# Altium PCB LedArray.PcbDoc
Units mm, origin at the board's own origin, x right, y up, seen from the top; angles counter-clockwise.
Board outline 67.5 x 20 mm, 2 copper layers (Top Layer, Bottom Layer); 41 components, 88 nets, 267 pads, 146 vias.
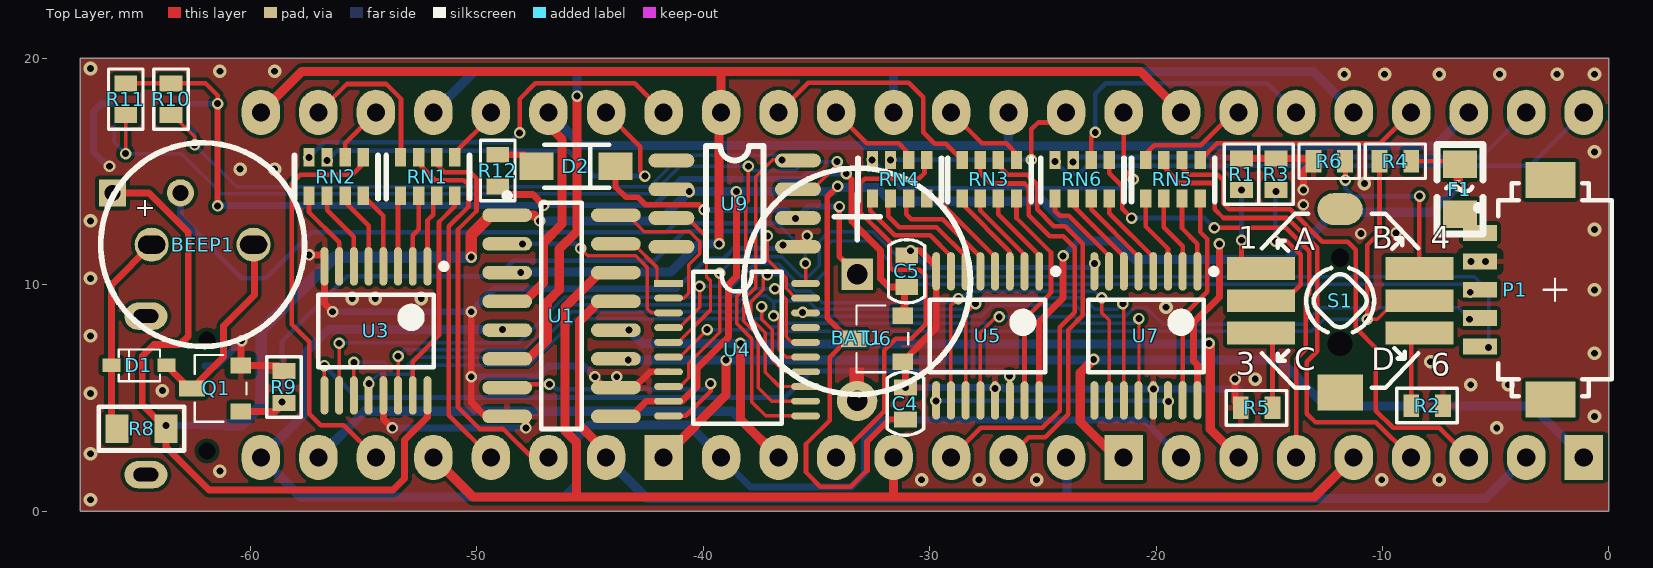
[diagram p0: Top Layer view]
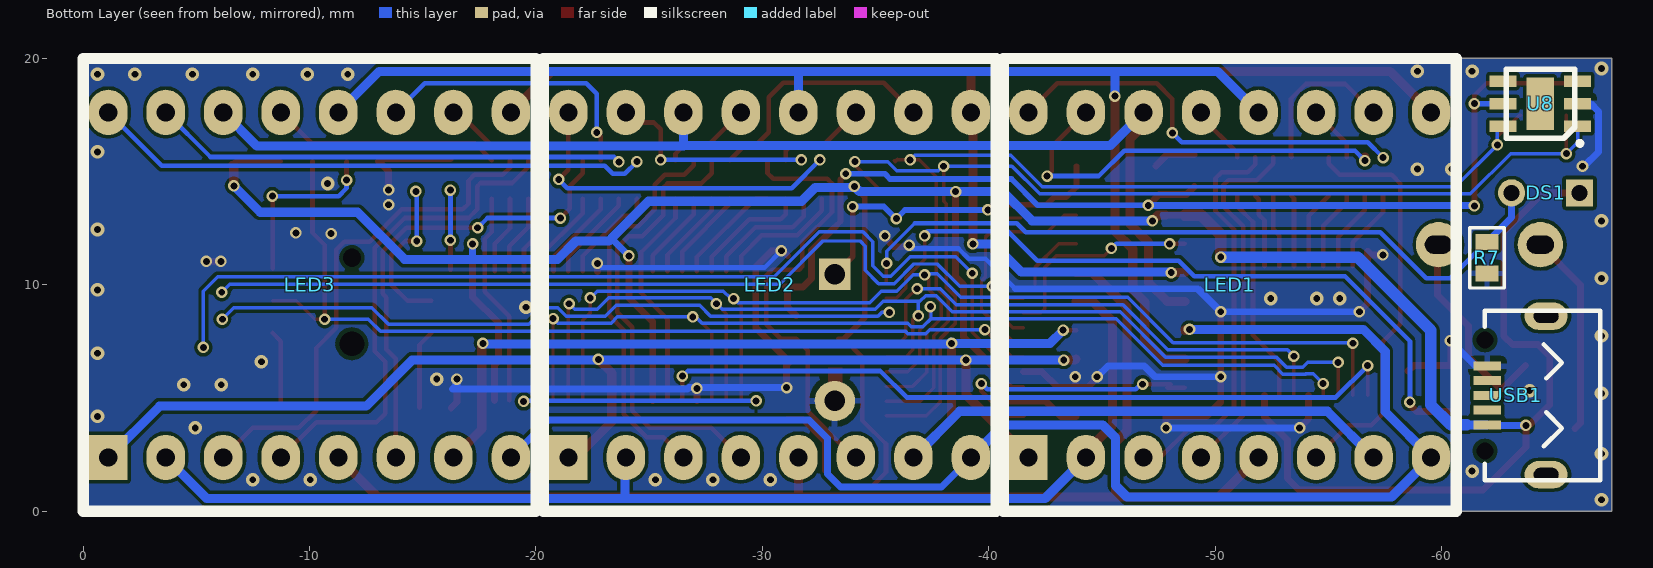
[diagram p1: Bottom Layer view, seen from below]
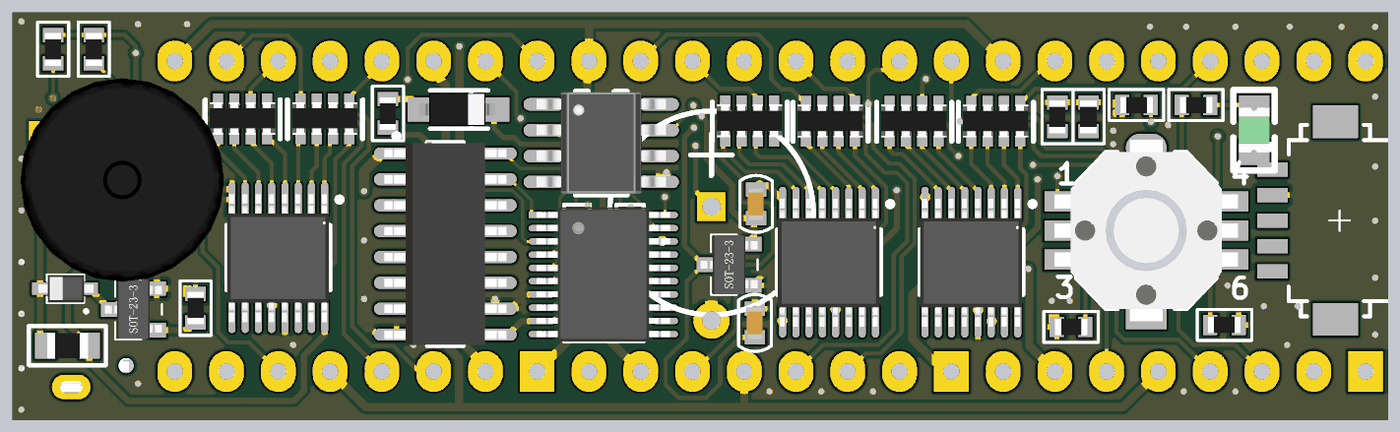
[diagram p2: 3D render of the assembled board from above, using the file's embedded part models]

## Layer stack, top to bottom
Top Solder: solder mask 0.0102, Solder Resist, Dk 3.5
Top Layer: signal copper 0.0356
Dielectric 1: dielectric 0.32, FR-4, Dk 4.8
Bottom Layer: signal copper 0.0356
Bottom Solder: solder mask 0.0102, Solder Resist, Dk 3.5

## Board outline
-67.5,0 -67.5,20 0,20 0,0

## Design rules (kind name [scope] priority, off if disabled: settings)
Clearance [All] p1: gap=0.152 ignorepadtopadclearanceinfootprint=FALSE
ComponentClearance ComponentClearance_1 [InComponent('BEEP1','LED1','LED2','LED3','BAT1','P1')] p1: gap=0 collisioncheckmode=3 verticalgap=0 showdistances=FALSE
ComponentClearance [All] p2: gap=0.254 collisioncheckmode=3 verticalgap=0.254 showdistances=FALSE
PolygonConnect PolygonConnect_1 [IsVia] p1: connectstyle=Direct reliefconductorwidth=0.254 reliefentries=4 polygonreliefangle="90 Angle" airgapwidth=0.254
PolygonConnect [All] p2: connectstyle=Relief reliefconductorwidth=0.254 reliefentries=4 polygonreliefangle="90 Angle" airgapwidth=0.254
RoutingVias [All] p1: holewidth=0.305 width=0.508 viastyle="Through Hole" minholewidth=0.305 minwidth=0.508 maxholewidth=0.711 maxwidth=1.27
SolderMaskExpansion [All] p1: expansion=0.102
Width [All] p1: maxlimit=0.508 minlimit=0.152 preferedwidth=0.203
29 further rules are at their usual default settings.

## Components (designator, comment, footprint, x,y, rotation, side; value= is the part's Value field where it differs from the comment)
BAT1 "BATT" BATTERY1 -33.198,16.561 r270 top locked
BEEP1 "BEEP" "蜂鸣器 9*5mm" -62.106,11.778 r0 top locked
C4 "0.1uF" 0603C -31.064,4.061 r90 top
C5 "0.1uF" 0603C -31.013,9.906 r90 top
D1 "S4" SOD-323F -63.709,6.444 r180 top
D2 "" SOD-123 -45.669,15.24 r0 top
DS1 "RES_PHOTO" LDR -64.586,14.064 r180 bottom
F1 "FUSE" 0805FZ -6.477,14.224 r270 top
LED1 "LED8*8 CPM7088BR" "LED8*8 CPM7088BR" -50.64,10 r180 bottom locked
LED2 "LED8*8 CPM7088BR" "LED8*8 CPM7088BR" -30.32,10 r180 bottom locked
LED3 "LED8*8 CPM7088BR" "LED8*8 CPM7088BR" -10,10 r180 bottom locked
P1 "CON5" SMT_1.25W-5P -5.682,12.286 r90 top
Q1 "S8050" SOT-23 -60.419,4.412 r90 top
R1 "10R" 0603R -16.223,15.588 r270 top
R2 "20K" 0603R -7.33,4.666 r180 top
R3 "2K" 0603R -14.699,15.588 r270 top
R4 "4.7K" 0603R -10.13,15.461 r0 top
R5 "4.7K" 0603R -16.256,4.572 r0 top
R6 "10K" 0603R -13.048,15.461 r0 top
R7 "4.7K" 0603R -62,10.5 r90 bottom
R8 "10R" 0805R -65.88,3.65 r0 top
R9 "10K" 0603R -58.514,4.79 r90 top
R10 "10K" 0603R -63.5,18.9 r270 top
R11 "10K" 0603R -65.5,18.9 r270 top
R12 "10K" 0603R -49.073,15.748 r270 top
RN1 "1K" 0603*4 -53.34,13.988 r0 top
RN2 "1K" 0603*4 -57.384,13.988 r0 top
RN3 "1K" 0603*4 -28.537,13.861 r0 top
RN4 "1K" 0603*4 -32.499,13.87 r0 top
RN5 "1K" 0603*4 -20.427,13.861 r0 top
RN6 "1K" 0603*4 -24.435,13.861 r0 top
S1 "SW-5WAY" SW_5WAY -11.867,9.299 r0 top locked
U1 "ICN2012" SOIC-16N -46.355,8.636 r270 top locked
U3 "74HC595" TSSOP16 -54.45,7.968 r180 top
U4 "N76E003AT20" TSSOP20 -41.529,10.063 r270 top locked
U5 "74HC595" TSSOP16 -27.432,7.747 r180 top locked
U6 "SGM2021-3.3" SOT-23 -31.191,6.604 r90 top
U7 "74HC595" TSSOP16 -20.447,7.747 r180 top locked
U8 "Si7021" QFN-6 -64.35,18 r90 bottom locked
U9 "DS3231MZ" SOIC-8 -41.402,15.494 r0 top locked
USB1 "USB_Micro" USB_Micro-A -62.01,5.118 r90 bottom locked

## Footprints (in the part's own frame and the unit in brackets; to place one, negate y for a bottom-side part, rotate by r counter-clockwise, add the part's x,y. Pads: shape width x height; smd on the part's side, far side on the other; paste and mask are expansions set on the pad)
0603*4 [mm]
  rect 0.5x0.8 smd: 1(-0.025,-0.051) 2(0.775,-0.051) 3(1.575,-0.051) 4(2.375,-0.051) 5(2.375,1.649) 6(1.575,1.649) 7(0.775,1.649) 8(-0.025,1.649)
  silkscreen extent -0.66,-0.18 3.02,1.73, body extent -0.43,0.01 2.77,1.61, height 0.51
0603C [mm]
  rect 0.7x1 smd: 1(0,0) 2(1.4,0)
  silkscreen extent -0.7,-0.8 2.1,0.8, body extent -0.11,-0.38 1.49,0.42, height 0.8
0603R [mm]
  rect 0.7x1 smd: 1(0,0) 2(1.4,0)
  silkscreen extent -0.64,-0.76 2.03,0.76, body extent -0.09,-0.41 1.51,0.39, height 0.41
0805FZ [mm]
  rect 1.2x1.5 smd: 1(-1.105,-0.1) 2(1.105,-0.1)
  silkscreen extent -1.98,-1.12 1.98,0.92, body extent -1.1,-0.85 1.11,0.65, height 1.24
0805R [mil]
  rect 40x50 smd: 1(0,0) 2(85,0)
  silkscreen extent -32,-38 117,38, body extent 4,-25 82,24, height 20
BATTERY1 [mil] "5.6mm"
  rect 55x55 hole 35.43: 1(240,0)
  round 70 hole 35.43: 2(460,0)
  silkscreen extent 55,-197 449,197
LDR [mm]
  rect 1.2x1.2 hole 0.7 mask+0.051: 1(1.5,0)
  round 1.2 hole 0.7 mask+0.051: 2(-1.5,0)
  body extent -2.5,-2.25 2.5,2.25, height 7.81
"LED8*8 CPM7088BR" [mm]
  rect 1.7x2 hole 0.8: 1(-8.89,-7.62)
  oval 1.7x2 hole 0.8: 2(-6.35,-7.62) 3(-3.81,-7.62) 4(-1.27,-7.62) 5(1.27,-7.62) 6(3.81,-7.62) 7(6.35,-7.62) 8(8.89,-7.62) 9(8.89,7.62) 10(6.35,7.62) 11(3.81,7.62) 12(1.27,7.62) 13(-1.27,7.62) 14(-3.81,7.62) 15(-6.35,7.62) 16(-8.89,7.62)
  silkscreen extent -10,-10 10,10
QFN-6 [mm] "Pitch 1mm"
  rect 2.3x1.2 smd: 0(0,0)
  rect 0.5x1.2 smd: 1(-1,-1.65) 2(0,-1.65) 3(1,-1.65) 4(1,1.65) 5(0,1.65) 6(-1,1.65)
  silkscreen extent -1.85,-1.85 1.52,1.5, body extent -1.52,-1.52 1.52,1.5, height 1
SMT_1.25W-5P [mm] "Pitch 1.25mm, Single Row, 9 Contacts, Right Angle SMT Header, Series DF13"
  rect 0.7x1.5 smd: 1(0,0) 2(-1.25,0) 3(-2.5,0) 4(-3.75,0) 5(-5,0)
  rect 1.6x2.2 smd: MEC1(-7.35,-3.1) MEC2(2.35,-3.1)
  silkscreen extent -7.2,-5.8 2.2,0.2
SOD-123 [mm] "Molded Diode, 2-Leads, Body 3.90x1.60mm, IPC Medium Density"
  rect 1.5x1.2 smd: 1(-1.7,0) 2(1.8,0)
  silkscreen extent -1.35,-0.94 1.52,0.94, body extent -1.85,-0.8 1.85,0.8, height 1.27
SOD-323F [mm]
  rect 0.8x0.6 smd: 1(0,0) 2(2.425,0)
  silkscreen extent 0.28,-0.7 2.1,0.7, body extent -0.19,-0.68 2.51,0.68, height 0.79
SOIC-8 [mil]
  oval 80x24 smd: 1(0,0) 2(0,-50) 3(0,-100) 4(0,-150) 5(220,-150) 6(220,-100) 7(220,-50) 8(220,0)
  silkscreen extent 60,-175 160,25, body extent -15,-173 235,24, height 74
SOIC-16N [mm] "SOIC, 16-Leads, Body 9.90x3.90mm, Pitch 1.27mm, IPC Medium Density"
  oval 0.6x2.2 smd: 1(-4.445,-2.3) 2(-3.175,-2.3) 3(-1.905,-2.3) 4(-0.635,-2.3) 5(0.635,-2.3) 6(1.905,-2.3) 7(3.175,-2.3) 8(4.445,-2.3) 9(4.445,2.5) 10(3.175,2.5) 11(1.905,2.5) 12(0.635,2.5) 13(-0.635,2.5) 14(-1.905,2.5) 15(-3.175,2.5) 16(-4.445,2.5)
  silkscreen extent -5.42,-2.42 5,1, body extent -4.95,-2.9 4.95,3.1, height 1.4
SOT-23 [mil]
  rect 28x36 smd: 1(0,0) 2(80,0)
  rect 28x45 smd: 3(40,85)
  silkscreen extent -18,-10 98,80, body extent -17,-10 97,100, height 47
SW_5WAY [mm] "Navigation Switch - Multidirectional 5 Way (4-directional and center push)"
  rect 3x1 smd: 1(-3.5,1.425) 2(-3.5,0) 3(-3.5,-1.425) 4(3.5,1.425) 5(3.5,0) 6(3.5,-1.425)
  oval 2x1.4 smd: 7(0,4.05)
  rect 2x1.6 smd: 8(0,-4.05)
  round 1 hole 1.1 unplated: 9(0,-1.9)
  round 0.5 hole 0.8 unplated: 10(0,1.9)
  silkscreen extent -3.45,-3.85 3.45,3.85, body extent -4.5,-4.45 4.5,4.45, height 4.5
TSSOP16 [mm] "TSOP, 16-Leads, Body 5.00x4.40mm, Pitch 0.65mm, IPC Medium Density"
  oval 0.35x1.7 smd: 1(-2.275,-2.85) 2(-1.625,-2.85) 3(-0.975,-2.85) 4(-0.325,-2.85) 5(0.325,-2.85) 6(0.975,-2.85) 7(1.625,-2.85) 8(2.275,-2.85) 9(2.275,2.85) 10(1.625,2.85) 11(0.975,2.85) 12(0.325,2.85) 13(-0.325,2.85) 14(-0.975,2.85) 15(-1.625,2.85) 16(-2.275,2.85)
  silkscreen extent -3.13,-2.97 2.55,1.6, body extent -2.49,-3.11 2.51,3.17, height 1.09
TSSOP20 [mil]
  rect 12x50 smd: 1(0,0)
  oval 12x50 smd: 2(25.59,0) 3(51.18,0) 4(76.77,0) 5(102.36,0) 6(127.95,0) 7(153.54,0) 8(179.13,0) 9(204.72,0) 10(230.32,0) 11(230.32,238.34) 12(204.72,238.34) 13(179.13,238.34) 14(153.54,238.34) 15(127.95,238.34) 16(102.36,238.34) 17(76.77,238.34) 18(51.18,238.34) 19(25.59,238.34) 20(0,238.34)
  silkscreen extent -20,43 244,197, body extent -15,-10 245,248, height 47
USB_Micro-A [mm]
  oval 1.2x1.9 hole 0.6 slot 1.1 at 90 deg unplated: 0(-3.5,-2.6) 0(3.5,-2.6)
  round 0.7 hole 0.75 unplated: 0(-2.45,0.1) 0(2.45,0.1)
  rect 0.4x1.2 smd: 1(-1.3,0) 2(-0.65,0) 3(0,0) 4(0.65,0) 5(1.3,0)
  silkscreen extent -3.75,-5 3.75,0.1, body extent -4.1,-5.18 4.1,0.25, height 2.98
"蜂鸣器 9*5mm" [mm]
  round 1.5 / inner round 1.5 / far side round 2 hole 0.8 slot 1.2 at 0 deg: 1(-2.25,0) 2(2.25,0)
  silkscreen extent -4.5,-4.5 4.5,4.5, body extent -5,-5 5,5, height 5.6

## Part data
BAT1: library part PWR_BAT
BEEP1: "发声器件"
C4 C5: library part CAP, "CAP"
D1: library part DIODE, "Diode"
D2: library part "DIODE SCHOTTKY", "Schottky Diode"
Q1: library part NPN, "贴片 S8050/S9013/MMBT3904"
R1 R2 R3 R4 R5 R6 R7 R8 R9 R10 R11 R12: library part RES, "RESISTOR"
RN1 RN2 RN3 RN4 RN5 RN6: library part RES_PACK-4
U1: "LED 行驱动"
U3 U5 U7: "移位寄存器", ComponentAvailability="Not for New Design", ComponentLink1Description="Manufacturer Link", ComponentLink1URL=http://www.onsemi.com/, ComponentLink2Description=Datasheet, ComponentLink2URL=http://www.onsemi.com/pub/Collateral/MC74VHC595-D.PDF, DatasheetVersion=1997, LatestRevisionDate=13-Apr-2006, LatestRevisionNote="IPC-7351 Footprint Added.", PackageDescription="16-Pin Small Outline Package 1.27 mm Pitch", PackageReference=966-01, PackageVersion=1997, Published=15-Apr-2002, Publisher="Altium Limited"
U4: "Nuvoton MCU"
U6: library part SGM2021, "电源芯片 LDO", VO=0.9V,1.2V,1.3V,1.5V,~~~5.0V
U8: "温湿度传感器"
U9: "时钟芯片;内置晶振、32.768K时钟输出、1Hz方波输出"

## Via types
v1: diameter 0.508, hole 0.305, Top Layer to Bottom Layer, tented both sides, 107 vias
v2: diameter 0.6, hole 0.3, Top Layer to Bottom Layer, tented both sides, 39 vias

## Nets (pads, with @x,y where several pads share a name; then routed paths per layer and width w, separated by ;. In a path a pad name is that pad's centre, name@x,y a point inside that pad or via, vN(x,y) a via of type N, cw(c..) or ccw(c..) an arc to the next point about the centre after c; other vN are vias at no path point)
3.3V: C5.1 R10.1 R11.1 R12.2 U6.2 U8.5 | length 49.1
  Top Layer w0.203: R11.1 R10.1 -61.978,18.9 -61.443,18.364 v1(-61.443,18.009)
  Top Layer w0.254: v1(-61.443,13.487) v1(-61.443,18.009) ; v1(-33.68,14.91) -33.68,14.884 -33.452,14.656 -33.452,12.802 -33.198,12.548
  Top Layer w0.305: R12.2 -48.72,13.995 -47.523,13.995 v1(-47.041,13.513) ; -33.198,12.548 -32.174,11.524 -32.174,10.279 -31.801,9.906 C5.1@-31.115,9.906 ; U6.2@-31.496,8.636 -31.115,9.017 C5.1@-31.115,9.906 ; C5.1 C5.1@-31.115,9.906
  Bottom Layer w0.254: U8.5 -61.451,18 v1(-61.443,18.009) ; v1(-47.041,13.513) -42.164,13.513 -40.996,14.681 -35.636,14.681 -35.408,14.91 v1(-33.68,14.91)
  Bottom Layer w0.305: v1@-61.443,13.513 v1(-47.041,13.513)
595_RCLK: U3.12 U4.14 U5.12 U7.12 | length 49
  Top Layer w0.152: U3.12 -54.762,5.131 v1(-54.762,5.639) ; v1(-37.414,9.042) v1@-37.411,9.042 ; v1@-37.389,9.017 v1(-37.414,9.042) -37.414,9.039 -37.416,9.041 -37.42,9.037 -37.42,8.484 -36.948,8.012 -36.948,6.697 -36.414,6.163 U4.14 ; v1@-37.385,9.017 v1@-37.411,9.042 ; v1@-37.363,9.09 v1@-37.411,9.042 ; U5.12 -27.757,7.879 -27.051,8.585 v1(-26.924,8.585) ; U7.12 -20.803,4.928 -20.752,4.978 v1(-20.752,8.509)
  Bottom Layer w0.152: v1(-54.762,5.639) -54.331,6.071 -54,6.071 -53.992,6.063 -52.984,6.063 -52.595,6.452 -47.676,6.452 -45.618,8.509 -37.445,8.509 ; v1@-37.389,9.017 v1(-37.414,9.042) -37.445,9.011 -37.445,8.509 ; v1(-20.752,8.509) -20.955,8.306 -23.317,8.306 -23.597,8.585 v1(-26.924,8.585) -27.051,8.585 -27.33,8.306 -36.422,8.306 -36.576,8.152 -37.088,8.152 -37.445,8.509
595_SCLK: U3.11 U4.15 U5.11 U7.11 | length 50.1
  Top Layer w0.152: U3.11 -55.423,5.12 v1(-55.423,6.579) ; v1(-36.888,8.635) -36.888,8.654 v1@-36.855,8.687 ; v1@-36.881,8.712 v1@-36.855,8.687 ; U4.15 -36.328,6.813 -36.644,7.129 -36.644,8.475 v1@-36.855,8.687 ; U5.11 -28.407,8.728 v1(-27.965,9.169) ; v1(-21.463,9.169) -21.432,9.169 -21.422,9.16 U7.11
  Bottom Layer w0.152: v1(-55.423,6.579) -54.077,6.579 -53.865,6.367 -53.145,6.367 -52.705,6.807 -47.803,6.807 -45.796,8.814 -38.379,8.814 -37.668,9.525 -37.208,9.525 -36.954,9.271 ; v1(-36.888,8.635) -36.888,9.205 -36.954,9.271 ; v1@-36.882,8.635 v1@-36.857,8.635 ; v1(-21.463,9.169) -21.717,8.915 -22.708,8.915 -23.216,9.423 -27.711,9.423 v1(-27.965,9.169) -28.219,8.915 -34.977,8.915 -35.332,9.271 -36.954,9.271
595_SCLR: U3.10 U4.13 U5.10 U7.10 | length 54.2
  Top Layer w0.152: U3.10 v1(-56.075,7.425) ; v1(-37.16,10.439) -37.338,10.262 -37.338,9.795 -37.557,9.576 -37.563,9.576 -37.897,9.242 -37.897,8.53 -37.253,7.886 -37.253,6.138 -36.628,5.513 U4.13 ; U5.10 -29.057,9.091 -28.75,9.398 v1(-28.727,9.398) ; v1(-22.397,9.425) -22.397,8.757 -22.072,8.432 U7.10
  Bottom Layer w0.152: v1(-56.075,7.425) -56.058,7.442 -48.133,7.442 -46.126,9.449 -38.76,9.449 -37.719,10.49 -37.211,10.49 v1(-37.16,10.439) -36.652,10.439 -35.941,9.728 -35.255,9.728 -34.747,9.22 -28.905,9.22 v1(-28.727,9.398) ; v1@-28.575,9.425 -28.271,9.728 -22.7,9.728 v1(-22.397,9.425)
595_SDI: U3.14 U4.16 | length 23.1
  Top Layer w0.152: U3.14 v1(-53.475,6.85) ; v1(-36.83,9.83) v1@-36.83,9.855 ; v1@-36.83,9.957 -36.805,9.931 -36.855,9.881 v1@-36.83,9.855 ; U4.16 -36.089,7.463 -36.339,7.713 -36.339,9.364 v1@-36.83,9.855
  Bottom Layer w0.152: v1(-53.475,6.85) -53.188,7.137 -47.904,7.137 -45.923,9.119 -38.557,9.119 -37.846,9.83 v1(-36.83,9.83)
+5V: C4.1 DS1.1 F1.1 R4.2 R8.2 U1.1 U1.9 U3.16 U4.9 U5.16 U6.3 U7.16 U9.2 USB1.1 | length 151.5
  Top Layer w0.203: U6.3 -33.604,7.62 -34.417,6.807 -34.417,4.013 -35.458,2.972 -35.458,1.727 -34.823,1.092 -33.477,1.092 -32.766,1.803 ; R4.2 -6.709,15.461 F1.1
  Top Layer w0.254: v1(-34.061,14.351) -34.519,13.894 -34.519,8.534 U6.3@-33.604,7.62 ; -32.766,1.803 -32.766,3.073 -31.778,4.061 C4.1
  Top Layer w0.305: DS1.1 -64.483,14.064 -62.738,12.319 -62.738,7.747 -63.119,7.366 -64.262,7.366 -64.77,6.858 -64.77,4.699 R8.2 ; v1(-63.721,3.792) R8.2 ; U3.16 -52.175,4.162 -53.188,3.15 -53.188,1.448 -53.696,0.94 -61.824,0.94 -63.721,2.837 R8.2 ; U1.1 U1.1@-47.803,13.081 ; U1.9 -43.18,4.191 -42.508,4.863 U4.9 -40.933,4.863 -40.259,5.537 -40.259,6.327 -38.887,7.699 -38.887,10.008 -38.532,10.363 v1(-38.532,14.122) ; U5.16 -25.157,8.371 -24.105,9.423 v1(-24.105,11.278) ; U7.16 -18.172,6.463 -18.339,6.629 -18.339,8.331 -17.196,9.474 v1(-17.196,11.811) ; F1.1@-6.655,15.251 F1.1
  Top Layer w0.406: U1.1@-47.803,13.081 -47.473,13.081 v1(-47.219,12.827) ; v1(-6.655,14.376) F1.1@-6.655,15.251
  Top Layer w0.508: v1(-50.241,11.227) -50.241,12.217 -49.378,13.081 U1.1
  Bottom Layer w0.305: v1(-63.721,3.792) -62.036,3.792 USB1.1 ; v1(-24.105,11.278) -23.33,12.052 ; v1(-17.196,11.811) -17.196,11.151 -17.17,11.125
  Bottom Layer w0.406: USB1.1 -61.095,3.818 ; v1(-47.219,12.827) -41.91,12.827 v1(-40.615,14.122) v1(-38.532,14.122) -34.29,14.122 v1(-34.061,14.351) -34.023,14.39 -33.933,14.3 -32.334,14.3 -31.725,13.691 -24.968,13.691 -23.33,12.052 ; -23.216,11.938 -21.768,11.938 -20.955,11.125 -17.17,11.125 -14.199,11.125 -12.116,13.208 -7.823,13.208 v1(-6.655,14.376)
  Bottom Layer w0.508: -61.095,3.818 -60.393,3.818 -59.512,4.699 -59.512,8.001 -56.286,11.227 v1(-50.241,11.227)
BEEPER: Q1.1 R9.1 U4.19 | length 32
  Top Layer w0.152: v1(-37.16,12.167) -37.16,11.125 -36.339,10.304 -36.339,9.847 -35.905,9.413 U4.19
  Top Layer w0.305: Q1.1 -58.892,4.412 R9.1
  Bottom Layer w0.203: v1(-58.598,4.826) -58.598,7.518 -55.728,10.389 -49.073,10.389 -48.387,11.074 -42.139,11.074 -40.843,12.37 -37.287,12.37 -37.16,12.243 v1(-37.16,12.167)
DS_INT: U4.5 U9.3 | length 7.6
  Top Layer w0.152: U4.5 -41.102,7.463 -39.675,8.89 -39.675,10.182 -39.853,10.36 -39.853,12.116 -40.691,12.954 U9.3
GND: BAT1.2 C4.2 C5.2 P1.2 Q1.2 R1.1 R2.1 R3.1 R5.1 R6.1 R7.1 R9.2 U1.8 U1.10 U3.8 U3.13 U4.7 U5.8 U5.13 U6.1 U7.8 U7.13 U8.2 U9.5 USB1.5 | length 99.6
  Top Layer w0.203: v1@-10.947,12.167 v1(-10.947,12.268)
  Top Layer w0.305: v1(-60.376,7.544) -60.419,7.501 Q1.2 -58.768,6.444 R9.2 ; v1(-57.404,11.328) -56.884,11.328 -56.725,11.488 U3.8 -56.725,9.176 v1(-56.363,8.814) ; U3.13 -54.125,4.087 v1(-53.721,3.683) ; v1(-50.241,8.814) v1(-50.241,5.944) -50.241,4.826 -49.606,4.191 U1.8 -47.854,4.191 -47.828,4.166 v1(-47.828,3.683) ; v1(-44.78,5.944) -44.78,5.893 -44.348,5.461 U1.10 ; v1(-43.815,5.944) -43.815,5.501 U1.10 ; U4.7 -42.351,6.163 -43.053,5.461 U1.10 ; v1(-36.474,11.76) -36.398,11.684 U9.5 -35.408,12.09 v1(-35.408,12.167) ; C5.2@-31.115,11.306 -30.915,11.506 v1(-30.836,11.506) -30.404,11.506 -29.707,10.809 U5.8 -29.707,8.088 U6.1 -31.064,6.477 v1(-31.064,5.461) ; U5.13 v1(-27.107,5.43) ; U7.8 -22.708,10.611 v1(-22.708,10.947) ; U7.13 -20.117,4.902 v1(-20.117,5.41) ; v1(-16.51,5.842) -16.51,4.826 R5.1 ; R1.1 R3.1 -13.175,15.588 R6.1 -13.487,15.022 v1(-13.487,14.199) ; v1(-6.084,11.036) P1.2 v1(-5.448,11.036)
  Bottom Layer w0.203: -41.173,9.83 -39.853,11.151 -39.116,11.151 -38.659,11.608 -36.627,11.608 v1(-36.474,11.76) ; v1(-30.836,11.506) -30.099,10.77 -22.885,10.77 v1(-22.708,10.947)
  Bottom Layer w0.305: v1(-66.218,15.24) -66.294,15.24 -66.929,15.875 -66.929,17.653 -66.582,18 U8.2 ; USB1.5 -61.502,6.418 v1(-60.376,7.544) ; v1(-56.363,8.814) v1(-50.241,8.814) -49.225,9.83 -41.173,9.83 ; v1(-53.721,3.683) -53.719,3.685 -47.83,3.685 v1(-47.828,3.683) ; v1(-50.241,5.944) -47.346,5.944 -46.863,6.426 -45.263,6.426 v1(-44.78,5.944) ; v1(-31.064,5.461) -26.749,5.461 -26.698,5.41 v1(-20.117,5.41) -16.307,5.41 -16.51,5.613 v1(-16.51,5.842)
  other v1: -9.398,12.294 -13.487,13.538
  other v2: -67.056,0.508 -30.353,1.397 -27.813,1.397 -25.273,1.397 -10.033,1.397 -7.493,1.397 -61.341,1.778 -67.056,2.54 -4.953,3.683 -0.635,4.191 -67.056,5.207 -63.881,5.334 -6.096,5.588 -4.445,5.588 -15.621,5.842 -7.874,6.604 -0.635,6.985 -67.056,7.747 -19.558,9.017 -55.499,9.398 -54.483,9.398 -52.451,9.398 -0.635,9.779 -67.056,10.287 -0.635,12.446 -67.056,12.827 -10.795,14.478 -60.452,15.113 -58.928,15.113 -0.635,15.875 -11.684,19.304 -9.906,19.304 -7.493,19.304 -4.826,19.304 -2.286,19.304 -0.635,19.304 -61.341,19.431 -58.928,19.431 -67.056,19.558
ICN_A0: U1.15 U4.1 | length 3
  Top Layer w0.152: U1.15 -43.079,11.811 -42.037,10.769 U4.1@-42.037,10.033
ICN_A1: U1.16 U4.2 | length 7.6
  Top Layer w0.152: U1.16 -43.332,13.081 -42.596,12.344 -40.597,12.344 -40.157,11.905 -40.157,11.379 -40.64,10.897 -40.64,9.627 -40.854,9.413 U4.2
ICN_A2: U1.2 U4.3 | length 9.5
  Top Layer w0.152: v1(-45.415,11.608) -45.09,11.282 -42.982,11.282 -42.469,10.77 -42.469,8.941 -42.291,8.763 U4.3
  Top Layer w0.203: U1.2 v1(-47.981,11.811)
  Bottom Layer w0.203: v1(-47.981,11.811) -45.618,11.811 v1(-45.415,11.608)
ICN_E1: U1.7 U4.10 | length 12.2
  Top Layer w0.203: U1.7 -47.879,5.461 -48.031,5.613 v1(-46.787,5.613) ; U4.10 -40.77,4.213 -39.675,5.309 v1(-39.675,5.639)
  Bottom Layer w0.203: v1(-46.787,5.613) -46.711,5.613 -46.482,5.385 -39.929,5.385 v1(-39.675,5.639)
ICPCK: P1.4 U4.18 | length 31.4
  Top Layer w0.152: v1(-35.611,8.788) U4.18@-35.45,8.788 ; U4.18 U4.18@-35.45,8.788 ; U4.18@-35.281,8.814 U4.18@-35.374,8.814 ; U4.18@-35.45,8.788 U4.18@-35.424,8.814 ; U4.18@-35.424,8.814 -35.399,8.839 U4.18@-35.374,8.814 ; U4.18@-35.424,8.814 U4.18@-35.374,8.814
  Bottom Layer w0.152: v1(-35.611,8.788) -35.281,8.788 -35.103,8.611 -27.708,8.611 -27.225,9.093 -23.546,9.093 -23.063,8.611 -21.339,8.611 -20.958,8.992 -20.422,8.992 -19.685,8.255 -13.487,8.255 -12.751,8.992 -6.655,8.992 v1(-6.147,8.484)
ICPDA: P1.5 U4.8 | length 45.9
  Top Layer w0.152: U4.8 -41.02,5.513 -40.64,5.893 -40.64,6.531 -39.268,7.903 v1(-39.268,10.516)
  Bottom Layer w0.152: v1(-39.268,10.516) -38.532,11.252 -36.525,11.252 -35.662,10.389 -35.331,10.389 -34.874,10.846 -34.874,11.913 -34.442,12.344 -32.512,12.344 -30.531,10.363 -5.944,10.363 -5.309,9.728 v1(-5.309,7.239)
KEY: R4.1 S1.5 U4.6 | length 41.5
  Top Layer w0.152: U4.6 -41.041,6.813 v1(-39.827,8.026) ; v1(-10.668,8.484) -10.236,8.484 -9.421,9.299 S1.5
  Top Layer w0.203: v1(-10.668,8.484) -10.668,11.76 -10.13,12.298 R4.1
  Bottom Layer w0.152: v1(-39.827,8.026) -37.394,8.026 -37.214,7.847 -36.424,7.847 -36.321,7.95 -13.132,7.95 -12.598,8.484 v1(-10.668,8.484)
NetBAT1_1: BAT1.1 D2.2 U9.6 | length 14.9
  Top Layer w0.254: D2.2 -43.869,14.329 -43.409,13.868 -42.875,13.868 -42.545,13.538 -40.183,13.538 v1(-39.954,13.31) ; v1(-33.985,13.462) -33.985,11.252 BAT1.1
  Bottom Layer w0.254: v1(-39.954,13.31) -36.297,13.31 v1(-35.916,12.929) ; v1@-35.89,12.929 -35.357,13.462 v1(-33.985,13.462)
NetBEEP1_1: BEEP1.1 D1.2 R8.1 | length 9
  Top Layer w0.305: R8.1 -66.134,3.904 D1.2 -66.134,10 BEEP1.1
NetBEEP1_2: BEEP1.2 D1.1 Q1.3 | length 9.1
  Top Layer w0.305: D1.1 -62.693,5.428 Q1.3 -61.181,6.825 -61.181,8.189 -59.817,9.553 -59.817,11.739 BEEP1.2
NetD2_1: D2.1 R12.1 | length 1.9
  Top Layer w0.305: R12.1 -47.877,15.748 D2.1
NetF1_2: F1.2 P1.1
NetLED1_3: LED1.3 RN1.6 | length 17.7
  Top Layer w0.203: RN1.6 -51.765,15.316 -51.432,14.983 -50.289,14.983 -50.009,14.703 -50.009,13.262 -50.825,12.446 -50.825,4.597 -49.865,3.637 -48.824,3.637 -47.567,2.38 LED1.3
NetLED1_4: LED1.4 RN1.7 | length 16
  Top Layer w0.203: RN1.7 -52.565,15.354 -51.838,14.627 -50.568,14.627 -50.365,14.424 -50.365,13.458 -51.232,12.591 -51.232,4.242 LED1.4
NetLED1_6: LED1.6 RN2.5 | length 18
  Top Layer w0.203: RN2.5 -55.009,15.349 -55.499,14.859 -57.785,14.859 -58.166,14.478 -58.166,8.255 -57.404,7.493 -57.404,4.318 -56.896,3.81 -55.88,3.81 LED1.6
NetLED1_10: LED1.10 RN1.8 | length 7
  Top Layer w0.203: LED1.10 -55.736,18.874 -53.993,18.874 -53.346,18.227 -53.346,15.656 RN1.8
NetLED1_11: LED1.11 RN2.6 | length 2.5
  Top Layer w0.203: RN2.6 -55.809,16.261 LED1.11
NetLED1_13: LED1.13 RN1.5 | length 2.6
  Top Layer w0.203: RN1.5 -50.965,15.837 -49.37,17.432 LED1.13
NetLED1_15: LED1.15 RN2.7 | length 18.4
  Top Layer w0.203: LED1.15 -42.774,16.104 -42.774,15.011 v1(-42.57,14.808)
  Top Layer w0.406: v1(-56.609,15.486) RN2.7
  Bottom Layer w0.203: v1(-56.609,15.486) -56.17,15.926 -45.974,15.926 -44.856,14.808 v1(-42.57,14.808)
NetLED1_16: LED1.16 RN2.8 | length 18.4
  Top Layer w0.203: v1(-57.409,15.626) RN2.8 ; v1(-48.108,16.713) -48.108,18.212 -47.422,18.898 -43.028,18.898 LED1.16
  Bottom Layer w0.203: v1(-57.409,15.626) -56.728,16.307 -48.514,16.307 v1(-48.108,16.713)
NetLED2_3: LED2.3 RN3.6 | length 17.3
  Top Layer w0.203: RN3.6 -26.962,15.278 -26.54,14.856 -25.682,14.856 -25.248,14.422 -25.248,13.335 -24.511,12.598 -24.003,12.598 -23.23,11.825 -23.23,8.652 -23.876,8.006 -23.876,4.293 -24.892,3.277 -25.613,3.277 LED2.3
NetLED2_4: LED2.4 RN3.7 | length 19.9
  Top Layer w0.203: LED2.4 -27.747,3.683 -25.019,3.683 -24.257,4.445 -24.257,8.128 -23.597,8.788 -23.597,11.633 -24.105,12.141 -24.689,12.141 -25.629,13.081 -25.629,14.3 -25.806,14.478 -27.305,14.478 -27.762,14.935 RN3.7
NetLED2_6: LED2.6 RN4.5 | length 20.4
  Top Layer w0.203: LED2.6@-34.528,2.778 LED2.6 -33.84,2.38 -33.84,2.583 -32.004,4.42 -32.004,7.112 -31.496,7.62 -30.81,7.62 -30.175,8.255 -30.175,10.414 -30.429,10.668 -31.623,10.668 -31.767,10.812 -31.767,11.91 -33.071,13.213 -33.071,14.478 -32.868,14.681 -30.48,14.681 -30.226,14.935 RN4.5@-30.226,15.51
NetLED2_10: LED2.10 RN3.8 | length 11
  Top Layer w0.203: LED2.10 -35.367,18.923 -30.912,18.923 -30.277,18.288 -30.277,16.739 -29.769,16.231 -29.283,16.231 RN3.8
NetLED2_11: LED2.11 RN4.6 | length 4.2
  Top Layer w0.203: LED2.11 -32.766,16.256 -31.369,16.256 -31.026,15.913 RN4.6@-31.026,15.51
NetLED2_13: LED2.13 RN3.5 | length 3.9
  Top Layer w0.203: LED2.13 -27.686,16.256 -26.619,16.256 -26.162,15.799 RN3.5
NetLED2_15: LED2.15 RN4.7 | length 9.5
  Top Layer w0.203: v1(-25.502,15.519) -25.502,16.866 -25.197,17.17 -24.42,17.17 LED2.15
  Bottom Layer w0.203: v1(-31.725,15.519) v1(-25.502,15.519) v1@-25.502,15.443
NetLED2_16: LED2.16 RN4.8 | length 15.4
  Top Layer w0.203: LED2.16 -21.43,15.08 v1(-21.006,14.656)
  Bottom Layer w0.203: v1(-32.537,15.519) -32.541,15.519 -31.296,14.275 -21.387,14.275 v1(-21.006,14.656)
NetLED3_3: LED3.3 RN5.6 | length 22.5
  Top Layer w0.203: RN5.6 -18.852,15.169 -18.539,14.856 -17.269,14.856 -17.018,14.605 -17.018,13.589 -16.764,13.335 -14.077,13.335 -12.654,11.913 -11.532,11.913 -11.176,11.557 -11.176,8.103 -10.287,7.214 -10.287,4.445 -9.525,3.683 -7.493,3.683 LED3.3
NetLED3_4: LED3.4 RN5.7 | length 22.1
  Top Layer w0.203: RN5.7 -19.652,15.207 -18.945,14.5 -17.548,14.5 -17.399,14.351 -17.399,13.335 -17.018,12.954 -14.199,12.954 -12.878,11.633 -12.878,7.061 -13.335,6.604 -13.335,4.318 -12.954,3.937 -10.287,3.937 LED3.4
NetLED3_6: LED3.6 RN6.5 | length 20.8
  Top Layer w0.203: RN6.5 -22.06,14.923 -21.488,14.351 -21.488,13.36 v1(-21.082,12.954) ; v1(-17.424,12.522) -14.275,12.522 -13.233,11.481 -13.233,9.601 -13.386,9.449 -13.386,7.163 -13.81,6.739 LED3.6
  Bottom Layer w0.203: v1(-21.082,12.954) -17.856,12.954 v1(-17.424,12.522)
NetLED3_10: LED3.10 RN5.8 | length 5.1
  Top Layer w0.203: RN5.8 -20.452,15.794 -20.082,16.164 -18.024,16.164 -16.568,17.62 LED3.10
NetLED3_11: LED3.11 RN6.6 | length 12.6
  Top Layer w0.203: RN6.6 -22.86,16.561 v1(-22.682,16.739)
  Bottom Layer w0.203: v1(-22.682,16.739) -22.682,18.44 -22.225,18.898 -15.088,18.898 LED3.11
NetLED3_13: LED3.13 RN5.5 | length 10.2
  Top Layer w0.203: RN5.5 -17.306,16.256 -10.094,16.256 LED3.13
NetLED3_15: LED3.15 RN6.7 | length 21
  Top Layer w0.203: v1(-23.66,15.43) RN6.7
  Bottom Layer w0.203: v1(-23.66,15.43) -23.444,15.646 -5.624,15.646 LED3.15
NetLED3_16: LED3.16 RN6.8 | length 24.8
  Top Layer w0.203: v1(-24.46,15.443) RN6.8
  Bottom Layer w0.203: v1(-24.46,15.443) -23.926,14.91 -23.393,14.91 -23.038,15.265 -3.465,15.265 LED3.16
NetR1_2: R1.2 S1.1 | length 3.5
  Top Layer w0.203: S1.1@-16.223,10.668 v1(-16.223,11.971)
  Bottom Layer w0.203: v1(-16.223,11.971) v1(-16.223,14.188)
NetR2_2: R2.2 S1.6 | length 3.4
  Top Layer w0.203: R2.2 -8.73,7.511 S1.6
NetR3_2: R3.2 S1.2 | length 7
  Top Layer w0.203: S1.2 -14.323,9.299 -13.613,10.009 -13.613,11.329 -14.222,11.938 v1(-14.732,11.938) ; v1(-14.699,14.13) R3.2
  Bottom Layer w0.203: v1(-14.732,11.938) -14.732,14.097 v1(-14.699,14.13)
NetR5_2: R5.2 S1.3 | length 3.5
  Top Layer w0.203: S1.3 -14.856,7.363 R5.2
NetR6_2: R6.2 S1.4 | length 7.8
  Top Layer w0.203: R6.2@-11.648,15.458 R6.2 -11.633,15.446 v1(-11.633,14.63) ; S1.4 -8.367,13.909 v1(-8.357,13.919)
  Bottom Layer w0.203: v1(-11.633,14.63) -11.633,14.264 -11.288,13.919 v1(-8.357,13.919)
NetRN1_1: RN1.1 U3.3 | length 3.2
  Top Layer w0.203: U3.3 -53.475,13.827 RN1.1
NetRN1_2: RN1.2 U3.2 | length 3.2
  Top Layer w0.203: U3.2 -52.825,12.199 -52.565,12.459 RN1.2
NetRN1_3: RN1.3 U3.1 | length 3.3
  Top Layer w0.203: U3.1 -52.175,12.849 -51.918,13.106 -51.918,13.785 RN1.3
NetRN1_4: RN1.4 U3.15 | length 9.6
  Top Layer w0.203: U3.15 -52.825,6.611 -51.664,7.772 -51.664,12.776 -50.965,13.474 RN1.4
NetRN2_1: RN2.1 U3.7 | length 3.7
  Top Layer w0.203: RN2.1 -57.409,13.213 -56.075,11.879 U3.7
NetRN2_2: RN2.2 U3.6 | length 3.6
  Top Layer w0.203: RN2.2 -56.609,13.302 -55.425,12.118 U3.6
NetRN2_3: RN2.3 U3.5 | length 3.5
  Top Layer w0.203: RN2.3 -55.809,13.645 -54.775,12.611 U3.5
NetRN2_4: RN2.4 U3.4 | length 3.5
  Top Layer w0.203: RN2.4 -54.125,13.053 U3.4
NetRN3_1: RN3.1 U5.3 | length 4.1
  Top Layer w0.203: RN3.1 -28.562,13.576 -26.457,11.471 U5.3
NetRN3_2: RN3.2 U5.2 | length 4
  Top Layer w0.203: RN3.2 -27.762,13.284 -25.807,11.329 U5.2
NetRN3_3: RN3.3 U5.1 | length 4
  Top Layer w0.203: RN3.3 -26.962,13.119 -25.157,11.314 U5.1
NetRN3_4: RN3.4 U5.15 | length 10
  Top Layer w0.203: RN3.4 -26.162,12.954 -24.638,11.43 -24.638,9.652 -25.807,8.483 U5.15
NetRN4_1: RN4.1 U5.7 | length 5.6
  Top Layer w0.203: RN4.1@-32.626,13.81 -32.626,13.271 -31.547,12.192 -29.972,12.192 -29.057,11.277 U5.7
NetRN4_2: RN4.2 U5.6 | length 5.6
  Top Layer w0.203: RN4.2@-31.826,13.81 -31.826,13.03 -31.344,12.548 -29.693,12.548 -28.407,11.262 U5.6
NetRN4_3: RN4.3 U5.5 | length 5.4
  Top Layer w0.203: RN4.3@-31.026,13.81 -31.026,13.119 -30.81,12.903 -29.413,12.903 -27.757,11.247 U5.5
NetRN4_4: RN4.4 U5.4 | length 4.8
  Top Layer w0.203: RN4.4@-30.226,13.81 -29.685,13.81 -27.107,11.232 U5.4
NetRN5_1: RN5.1 U7.3 | length 3.6
  Top Layer w0.203: RN5.1 -20.452,12.578 -19.472,11.598 U7.3
NetRN5_2: RN5.2 U7.2 | length 3.6
  Top Layer w0.203: RN5.2 -19.652,12.54 -18.822,11.71 U7.2
NetRN5_3: RN5.3 U7.1 | length 3.5
  Top Layer w0.203: RN5.3 -18.852,12.502 -18.172,11.822 U7.1
NetRN5_4: RN5.4 U7.15 | length 9.5
  Top Layer w0.203: U7.15 -18.822,8.61 -17.743,9.689 -17.743,12.028 -18.052,12.337 RN5.4
NetRN6_1: RN6.1 U7.7 | length 4.4
  Top Layer w0.203: RN6.1 -24.46,13.259 -24.257,13.056 -23.851,13.056 -22.072,11.277 U7.7
NetRN6_2: RN6.2 U7.6 | length 4.1
  Top Layer w0.203: RN6.2 -23.66,13.5 -21.422,11.262 U7.6
NetRN6_3: RN6.3 U7.5 | length 4.1
  Top Layer w0.203: RN6.3 -22.86,13.335 -20.772,11.247 U7.5
NetRN6_4: RN6.4 U7.4 | length 4
  Top Layer w0.203: RN6.4 -22.06,13.17 -20.122,11.232 U7.4
NetU3_9: U3.9 U5.14 | length 33.8
  Top Layer w0.152: U3.9 v1(-56.725,6.433)
  Top Layer w0.203: v1(-26.467,5.969) -26.467,4.989 -26.416,4.938 U5.14
  Bottom Layer w0.203: v1(-56.725,6.433) -55.321,5.029 -36.373,5.029 -35.204,6.198 -26.695,6.198 v1(-26.467,5.969)
NetU5_9: U5.9 U7.14 | length 10.4
  Top Layer w0.203: v1(-29.718,4.877) -29.718,4.886 U5.9 ; U7.14 -19.431,4.856 -19.436,4.851 v1(-19.456,4.851)
  Bottom Layer w0.203: v1(-29.718,4.877) -19.456,4.877 v1(-19.456,4.851)
PHOTO: DS1.2 R7.2 U4.20 | length 32.8
  Top Layer w0.152: v1(-35.484,10.947) -35.475,10.939 U4.20 U4.20@-35.454,10.063
  Bottom Layer w0.152: -36.728,12.725 -35.484,11.481 v1(-35.484,10.947)
  Bottom Layer w0.203: R7.2 -61.989,11.9 -60.376,10.287 -59.309,10.287 -57.277,12.319 -41.631,12.319 -41.224,12.725 -36.728,12.725
  Bottom Layer w0.305: DS1.2 -63.086,12.986 R7.2
ROW_1: LED1.9 LED2.9 LED3.9 U1.3 | length 60.5
  Top Layer w0.406: LED1.9 -57.719,19.431 -39.243,19.431 ; U1.3 v1(-48.057,10.541) ; v1(-39.294,11.811) -39.294,17.272 -39.345,17.323 -38.913,17.323 -39.075,17.485 -39.345,17.485 LED2.9 -39.21,19.398 -39.243,19.431 ; LED3.9 -20.701,19.431 -39.243,19.431
  Bottom Layer w0.406: v1(-48.057,10.541) -48.031,10.566 -41.427,10.566 -40.183,11.811 v1(-39.294,11.811)
ROW_2: LED1.14 LED2.14 LED3.14 U1.4 | length 53.4
  Top Layer w0.406: U1.4 -47.879,9.271 -47.053,10.096 -47.053,11.874 -46.228,12.7 -46.228,16.434 -46.83,17.036 LED1.14
  Bottom Layer w0.406: LED1.14 -45.364,16.154 -26.535,16.154 -26.51,16.129 ; LED2.14 -26.51,16.129 ; LED3.14 -7.681,16.129 -26.51,16.129
ROW_3: LED1.8 LED2.8 LED3.8 U1.5 | length 62.7
  Top Layer w0.406: v1(-48.861,8.035) -48.689,8.035 U1.5
  Bottom Layer w0.305: LED2.8 -37.905,1.075 -33.443,1.075 -32.868,1.651 -32.868,3.226 -32.055,4.039 -20.549,4.039 LED3.8
  Bottom Layer w0.406: v1(-48.861,8.035) -56.532,8.035 -57.506,7.061 -57.506,4.404 LED1.8 -57.785,0.635 -46.101,0.635 -45.593,1.143 -45.593,3.251 -45.034,3.81 -40.64,3.81 LED2.8
ROW_4: LED1.12 LED2.12 LED3.12 U1.6 | length 58.5
  Top Layer w0.406: U1.6 -47.727,6.731 -46.888,7.569 -46.888,9.246 -46.355,9.779 -46.355,11.582 -45.568,12.37 v1(-45.568,18.339)
  Bottom Layer w0.406: LED1.12 -50.099,19.431 -45.568,19.431 ; v1(-45.568,18.339) -45.568,19.431 ; LED2.12 -31.59,19.431 ; LED3.12 -13.081,19.431 -31.59,19.431 ; -45.568,19.431 -31.59,19.431
ROW_5: LED1.1 LED2.1 LED3.1 U1.11 | length 55.5
  Top Layer w0.406: U1.11 -43.804,6.68 v1(-43.307,6.68) ; LED1.1 -38.989,5.141 v1(-38.989,6.68) ; v1(-22.758,6.706) -23.343,6.121 -23.343,3.962 -21.76,2.38 LED2.1
  Bottom Layer w0.406: v1(-43.307,6.68) v1(-38.989,6.68) -14.529,6.68 -12.497,4.648 -3.378,4.648 LED3.1
ROW_6: LED1.7 LED2.7 LED3.7 U1.12 | length 59.8
  Top Layer w0.203: U1.12 v1(-43.282,8.001)
  Top Layer w0.406: v1(-38.354,7.417) -38.354,4.064 LED2.7 ; v1(-17.653,7.417) -17.602,7.366 -17.602,3.632 LED3.7
  Bottom Layer w0.406: LED1.7 -54.95,4.42 -38.71,4.42 LED2.7 ; v1(-43.282,8.001) -42.697,7.417 v1(-38.354,7.417) -38.354,7.442 -38.329,7.468 -38.252,7.391 -17.678,7.391 v1(-17.653,7.417)
ROW_7: LED1.2 LED2.2 LED3.2 U1.13 | length 52.4
  Top Layer w0.406: LED1.2 -44.29,2.634 -45.466,3.81 -45.466,8.382 -44.577,9.271 U1.13
  Bottom Layer w0.406: LED1.2 -42.477,0.567 -23.944,0.567 ; LED2.2 -23.927,2.337 -23.927,0.584 -23.944,0.567 ; LED3.2 -5.463,0.567 -23.944,0.567
ROW_8: LED1.5 LED2.5 LED3.5 U1.14 | length 55.3
  Top Layer w0.406: LED1.5 -50.165,0.635 -45.593,0.635 ; U1.14 -44.577,10.541 -46.101,9.017 -46.101,3.556 -45.593,3.048 -45.593,0.635 ; LED2.5 -31.59,0.635 ; LED3.5 -13.015,0.635 -31.59,0.635 ; -45.593,0.635 -31.59,0.635
RST: P1.3 U4.4 | length 39.8
  Top Layer w0.152: U4.4 -41.061,8.113 -40.157,9.017 v1(-40.157,9.931)
  Bottom Layer w0.152: v1(-40.157,9.931) -38.709,9.931 -37.718,10.922 -36.678,10.922 -35.814,10.058 -35.128,10.058 -34.544,10.643 -34.544,11.709 -34.315,11.938 -32.664,11.938 -30.759,10.033 -6.477,10.033 v1(-6.121,9.677)
SCL: R10.2 U4.12 U8.6 U9.8 | length 44.5
  Top Layer w0.152: R10.2 -63.423,17.5 -62.459,16.535 v1(-62.459,16.18) ; U9.8 -35.865,15.443 -35.966,15.545 -35.992,15.519 v1(-36.525,15.519) -36.932,15.519 -37.684,14.767 -37.684,9.881 -37.69,9.881 -38.202,9.369 -38.202,8.403 -37.558,7.76 -37.558,5.452 -36.969,4.863 U4.12
  Bottom Layer w0.152: U8.6 -62.459,16.759 v1(-62.459,16.18) -60.604,14.326 -42.367,14.326 -40.97,15.723 -36.728,15.723 v1(-36.525,15.519)
SDA: R11.2 U4.11 U8.1 U9.7 | length 51.9
  Top Layer w0.152: v1(-65.507,15.799) -65.5,15.805 R11.2 ; v1(-37.998,15.24) -37.998,13.716 -38.125,13.589 -38.125,9.876 -38.506,9.495 -38.506,8.277 -37.863,7.633 -37.863,4.843 -37.233,4.213 U4.11 ; U9.7 -35.154,14.224 -34.087,15.291 v1(-34.087,15.443)
  Bottom Layer w0.152: U8.1 -66,16.292 v1(-65.507,15.799) -63.043,15.799 -61.265,14.021 -42.24,14.021 -41.021,15.24 v1(-37.998,15.24) -37.973,15.24 -37.77,15.037 -35.941,15.037 -35.535,15.443 v1(-34.087,15.443)
pads on no net: P1.MEC1 P1.MEC2 S1.7 S1.8 S1.9 S1.10 U4.17 U7.9 U8.0 U8.3 U8.4 U9.1 U9.4 USB1.0 USB1.2 USB1.3 USB1.4

## Polygon pours and split planes (outlines as drawn)
GND on Top Layer "GND_L01_P000" (solid, remove dead copper, pour order 0): -67.5,20 0,20 0,0 -67.5,0
GND on Bottom Layer "GND_L02_P002" (solid, remove dead copper, pour order 2): -67.5,20 0,20 0,0 -67.5,0

## Other copper
Top Layer:
  rectangle net GND: -33.528,5.08 -32.893,6.35

## Silkscreen, mask and mechanical layers (free items; w line width, h text height)
Mechanical 15:
  the board outline again, w0.5

## Text inside footprints (layer, text, board x,y; h text height)
BEEP1: Top Overlay "+" at -65.106,13.028 h0.81
S1: Top Overlay "C" at -13.885,6.239 h1; Top Overlay "A" at -13.885,11.539 h1; Top Overlay "D" at -10.485,6.239 h1; Top Overlay "B" at -10.467,11.599 h1; Top Overlay "3" at -16.474,6.021 h1; Top Overlay "6" at -7.874,5.988 h1; Top Overlay "4" at -7.867,11.599 h1; Top Overlay "1" at -16.367,11.599 h1